# Altium PCB Fuel Level Monitoring System.PcbDoc
Units mil, origin at the board's own origin, x right, y up, seen from the top; angles counter-clockwise.
Board outline 4080 x 800 mil, 4 copper layers (Top Layer, Layer 1, Layer 2, Bottom Layer), stack 23.756 mil thick; 46 components, 41 nets, 127 pads, 37 vias.
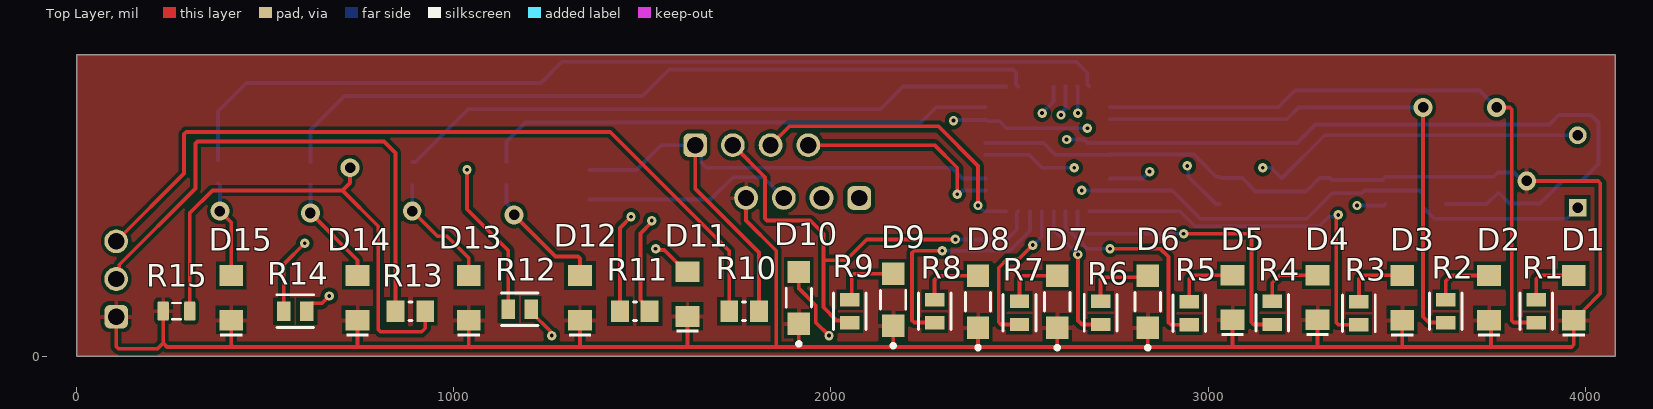
[diagram p0: Top Layer view]
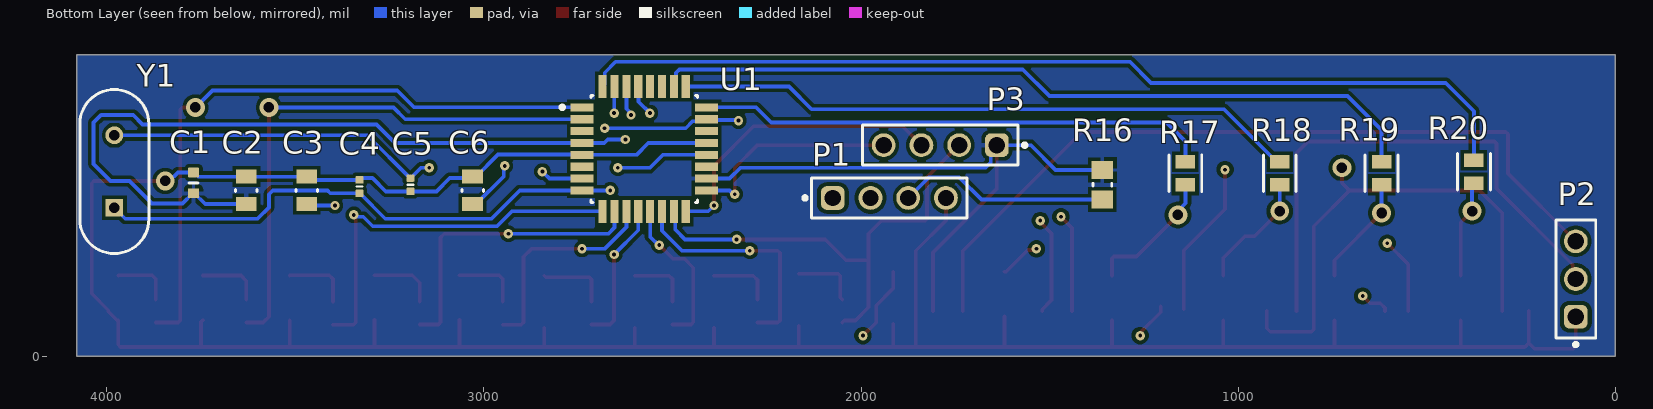
[diagram p1: Bottom Layer view, seen from below]
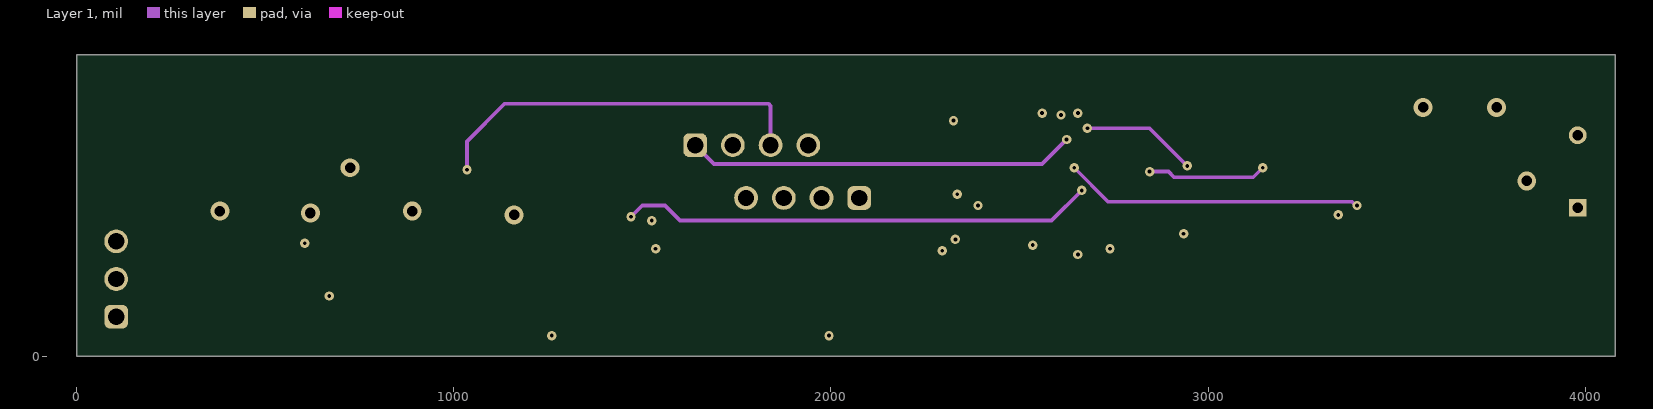
[diagram p2: Layer 1]
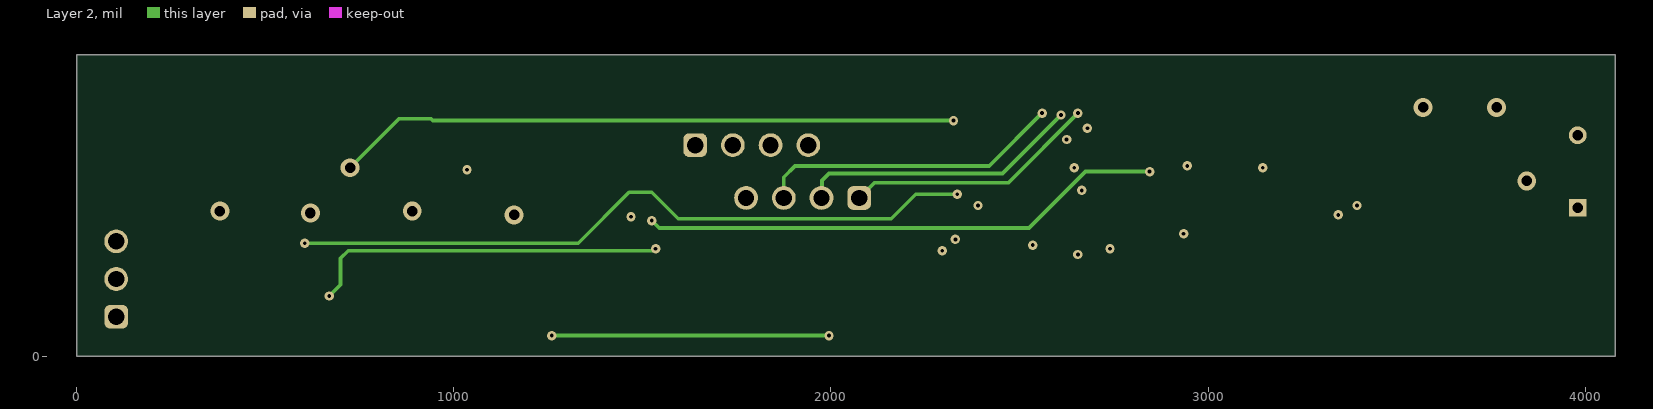
[diagram p3: Layer 2]
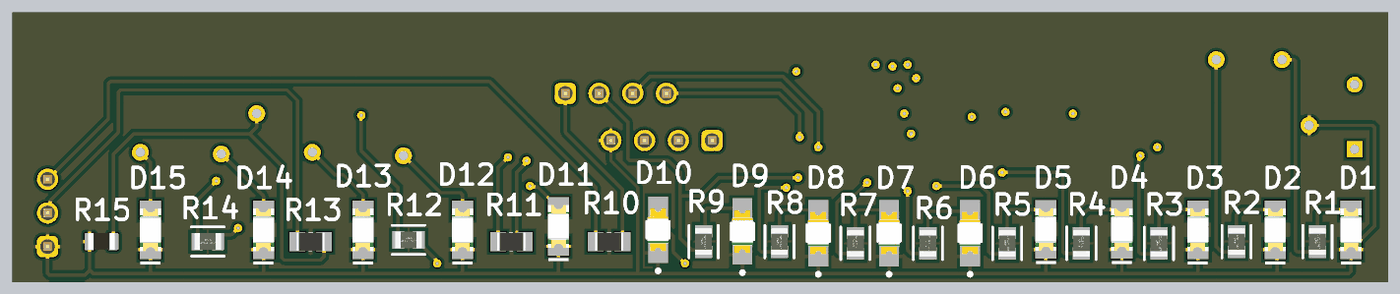
[diagram p4: 3D render of the assembled board from above, using the file's embedded part models]
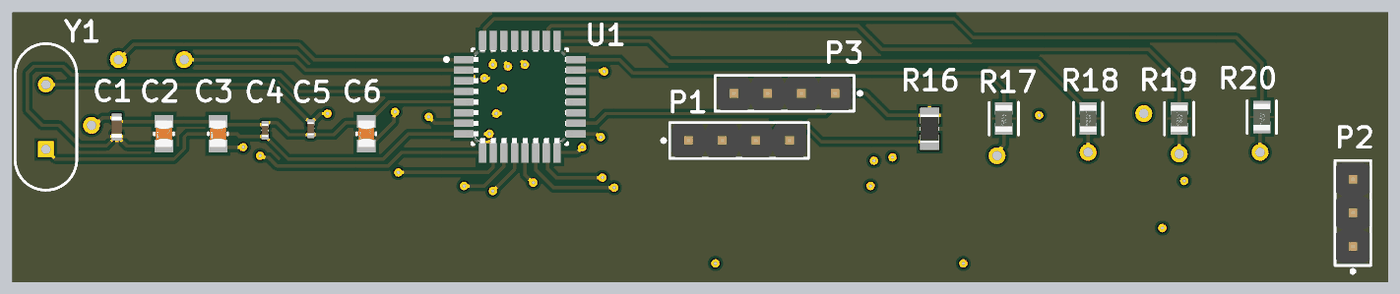
[diagram p5: 3D render of the assembled board from below, using the file's embedded part models]

## Layer stack, top to bottom
Top Solder: solder mask 0.4, Solder Resist, Dk 3.5
Top Layer: signal copper 1.4
Dielectric 2: prepreg 2.8, PP-006, Dk 4.1
Layer 1: signal copper 1.378
Dielectric 1: dielectric 12.6, FR-4, Dk 4.8
Layer 2: signal copper 1.378
Dielectric 3: prepreg 2.8, PP-006, Dk 4.1
Bottom Layer: signal copper 1.4
Bottom Solder: solder mask 0.4, Solder Resist, Dk 3.5

## Board outline
0,0 4080,0 4080,800 0,800

## Design rules (kind name [scope] priority, off if disabled: settings)
Clearance [All] p1: gap=10 ignorepadtopadclearanceinfootprint=TRUE except(0: Arc-Hole Track-Hole SMDPad-Hole THPad-Hole Via-Hole Fill-Hole Poly-Hole Region-Hole Text-Hole)
MinimumSolderMaskSliver [All] p1: minsoldermaskwidth=1
PolygonConnect [All] p1: connectstyle=Relief reliefconductorwidth=10 reliefentries=4 polygonreliefangle="90 Angle" airgapwidth=10
RoutingVias [All] p1: holewidth=28 width=50 viastyle="Through Hole" minholewidth=10 minwidth=20 maxholewidth=28 maxwidth=50
SilkToSolderMaskClearance [IsPad] p1: minsilkscreentomaskgap=1 clearancetoexposedcopper=TRUE
SolderMaskExpansion [All] p1: expansion=4 istentingtop=FALSE
Width [All] p1: maxlimit=10 minlimit=10 preferedwidth=10
28 further rules are at their usual default settings.

## Components (designator, comment, footprint, x,y, rotation, side; value= is the part's Value field where it differs from the comment)
C1 "Capacitor 10µF +/-20% 10V 0603" CAPC0603(1608)100_L 3770,460 r90 bottom value=10uF
C2 "0.1uF" FP-CC0805-0_85-MFG 3630,440 r270 bottom value="100 nF"
C3 "0.1uF" FP-CC0805-0_85-MFG 3470,440 r270 bottom value="100 nF"
C4 "Capacitor 22pF +/-10% 50V 0402" CAPC0402(1005)60_L 3330,450 r90 bottom value=22pF
C5 "Capacitor 22pF +/-10% 50V 0402" CAPC0402(1005)60_L 3195,455 r270 bottom value=22pF
C6 "0.1uF" FP-CC0805-0_85-MFG 3030,440 r270 bottom value="100 nF"
D1 "150120GS75000" WL-SMCW_1206_150120xx75000 3969.58,155 r90 top
D2 "150120GS75000" WL-SMCW_1206_150120xx75000 3745,155 r90 top
D3 "150120GS75000" WL-SMCW_1206_150120xx75000 3515,155 r90 top
D4 "150120GS75000" WL-SMCW_1206_150120xx75000 3290,155.94 r90 top
D5 "150120GS75000" WL-SMCW_1206_150120xx75000 3065,155.94 r90 top
D6 "LTST-C150KSKT" FP-LTST-C150KSKT-MFG 2840,145 r90 top
D7 "LTST-C150KSKT" FP-LTST-C150KSKT-MFG 2600,145 r90 top
D8 "LTST-C150KSKT" FP-LTST-C150KSKT-MFG 2390,145 r90 top
D9 "LTST-C150KSKT" FP-LTST-C150KSKT-MFG 2165,150 r90 top
D10 "LTST-C150KSKT" FP-LTST-C150KSKT-MFG 1915,155 r90 top
D11 "150120BS75000" WL-SMCW_1206_150120xx75000 1620,165 r90 top
D12 "150120BS75000" WL-SMCW_1206_150120xx75000 1335,155 r90 top
D13 "150120BS75000" WL-SMCW_1206_150120xx75000 1040,155 r90 top
D14 "150120RS75000" WL-SMCW_1206_150120xx75000 745,155 r90 top
D15 "150120RS75000" WL-SMCW_1206_150120xx75000 410,155 r90 top
P1 "61300411121" 61300411121 1925,420 r180 bottom
P2 "61300311121" 61300311121 105,205 r90 bottom
P3 "61300411121" 61300411121 1790,560 r0 bottom
R1 "CRGCQ0805J470R" FP-CRGCQ0805-IPC_C 3870,120 r90 top value=470Ω
R2 "CRGCQ0805J470R" FP-CRGCQ0805-IPC_C 3630,120 r90 top value=470Ω
R3 "CRGCQ0805J470R" FP-CRGCQ0805-IPC_C 3400,114.45 r90 top value=470Ω
R4 "CRGCQ0805J470R" FP-CRGCQ0805-IPC_C 3170,115 r90 top value=470Ω
R5 "CRGCQ0805J470R" FP-CRGCQ0805-IPC_C 2950,114.45 r90 top value=470Ω
R6 "CRGCQ0805J470R" FP-CRGCQ0805-IPC_C 2715,115 r90 top value=470Ω
R7 "CRGCQ0805J470R" FP-CRGCQ0805-IPC_C 2500,115 r90 top value=470Ω
R8 "CRGCQ0805J470R" FP-CRGCQ0805-IPC_C 2275,120 r90 top value=470Ω
R9 "CRGCQ0805J470R" FP-CRGCQ0805-IPC_C 2050,120 r90 top value=470Ω
R10 "RC0805JR-070RL" RESC2013X60X35ML10T20 1770,120 r0 top
R11 "RC0805JR-070RL" RESC2013X60X35ML10T20 1480,120 r180 top
R12 "CRGCQ0805J470R" FP-CRGCQ0805-IPC_C 1175,125 r0 top value=470Ω
R13 "RC0805JR-070RL" RESC2013X60X35ML10T20 885,120 r0 top
R14 "CRGCQ0805J470R" FP-CRGCQ0805-IPC_C 580,120 r0 top value=470Ω
R15 "Resistor 1K +/-5% 0805 125 mW" RESC0805(2012)_L 265,120 r0 top value=1k
R16 "RC0805JR-0710KL" RESC2013X60X35ML10T20 1360,455 r90 bottom
R17 "CRGCQ0805J470R" FP-CRGCQ0805-IPC_C 1140,485 r270 bottom value=470Ω
R18 "CRGCQ0805J470R" FP-CRGCQ0805-IPC_C 890,485 r270 bottom value=470Ω
R19 "CRGCQ0805J470R" FP-CRGCQ0805-IPC_C 620,485 r270 bottom value=470Ω
R20 "CRGCQ0805J470R" FP-CRGCQ0805-IPC_C 375,489.45 r270 bottom value=470Ω
U1 "ATMEGA328PB-AUR" FP-C04-074-MFG 2575,550 r180 bottom
Y1 "49S/18PF" JPY-49S-18PF 3980,490 r90 bottom

## Footprints (in the part's own frame and the unit in brackets; to place one, negate y for a bottom-side part, rotate by r counter-clockwise, add the part's x,y. Pads: shape width x height; smd on the part's side, far side on the other; paste and mask are expansions set on the pad)
61300311121 [mm] "Pin Header, pitch 2.54 mm, THT, Vertical, single row, 3p"
  rrect50% 1.6x1.6 hole 1.1: 1(-2.54,0)
  round 1.6 hole 1.1: 2(0,0) 3(2.54,0)
  silkscreen extent -4.53,-1.35 3.96,1.35, body extent -3.81,-1.27 3.81,1.27, height 8.57
61300411121 [mm] "Pin Header, pitch 2.54 mm, THT, Vertical, single row, 4p"
  rrect50% 1.6x1.6 hole 1.1: 1(-3.81,0)
  round 1.6 hole 1.1: 2(-1.27,0) 3(1.27,0) 4(3.81,0)
  silkscreen extent -5.8,-1.35 5.23,1.35, body extent -5.08,-1.27 5.08,1.27, height 8.57
CAPC0402(1005)60_L [mm] "Chip Capacitor, Body 1.0x0.5mm, Height 0.6mm, IPC High Density"
  rrect25% 0.5x0.55 smd: 1(-0.45,0) 2(0.45,0)
  silkscreen extent 0,-0.2 0,0.2, body extent -0.5,-0.25 0.5,0.25, height 0.6
CAPC0603(1608)100_L [mm] "Chip Capacitor, Body 1.6x0.8mm, Height 1.0mm, IPC High Density"
  rrect25% 0.66x0.76 smd: 1(-0.7,0) 2(0.7,0)
  silkscreen extent 0,-0.3 0,0.3, body extent -0.8,-0.4 0.8,0.4, height 0.95
FP-C04-074-MFG [mm]
  rect 1.55x0.55 smd paste+0 mask+0: 1(-4.2,2.8) 2(-4.2,2) 3(-4.2,1.2) 4(-4.2,0.4) 5(-4.2,-0.4) 6(-4.2,-1.2) 7(-4.2,-2) 8(-4.2,-2.8) 17(4.2,-2.8) 18(4.2,-2) 19(4.2,-1.2) 20(4.2,-0.4) 21(4.2,0.4) 22(4.2,1.2) 23(4.2,2) 24(4.2,2.8)
  rect 0.55x1.55 smd paste+0 mask+0: 9(-2.8,-4.2) 10(-2,-4.2) 11(-1.2,-4.2) 12(-0.4,-4.2) 13(0.4,-4.2) 14(1.2,-4.2) 15(2,-4.2) 16(2.8,-4.2) 25(2.8,4.2) 26(2,4.2) 27(1.2,4.2) 28(0.4,4.2) 29(-0.4,4.2) 30(-1.2,4.2) 31(-2,4.2) 32(-2.8,4.2)
  silkscreen extent -5.65,-3.6 3.6,3.6, body extent -4.51,-4.51 4.51,4.51, height 1.2
FP-CC0805-0_85-MFG [mm]
  rect 0.95x1.4 smd paste+0 mask+0: 1(-0.925,0) 2(0.925,0)
  silkscreen extent -0.08,-0.72 0.08,0.72, body extent -1,-0.63 1,0.63, height 0.95
FP-CRGCQ0805-IPC_C [mil]
  rect 35.67x51.57 smd paste+0 mask+0: 1(-30.55,0) 2(30.55,0)
  silkscreen extent -48,-43 48,43, body extent -52,-31 52,31, height 10
FP-LTST-C150KSKT-MFG [mm]
  rect 1.5x1.5 smd paste+0 mask+0: 1(-1.75,0) 2(1.75,0)
  silkscreen extent -3.22,-0.85 0.63,0.85, body extent -2.6,-0.95 2.6,0.95, height 0.25
JPY-49S-18PF [mm] "THD, 2-Leads, Body 11.05x4.65mm, Pitch 4.88mm"
  rect 1.2x1.2 hole 0.7: 1(-2.44,0)
  round 1.2 hole 0.7: 2(2.44,0)
  silkscreen extent -5.53,-2.32 5.53,2.32, body extent -5.52,-2.32 5.53,2.33, height 3.5
RESC0805(2012)_L [mm] "Chip Resistor, Body 2.0x1.3mm, IPC High Density"
  rrect25% 0.76x1.3 smd: 1(-0.9,0) 2(0.89,0)
  silkscreen extent -0.3,-0.55 0.3,0.55, body extent -1,-0.62 1,0.63, height 0.6
RESC2013X60X35ML10T20 [mm] "Chip Resistor, 2-Leads, Body 2.1x1.35mm, IPC Low Density"
  rect 1.2x1.45 smd: 1(-1,0) 2(1,0)
  silkscreen extent -0.1,-0.63 0.1,0.63, body extent -1.05,-0.68 1.05,0.67, height 0.6
WL-SMCW_1206_150120xx75000 [mm] "SMD Mono-color Chip LED, body 3.2x1.6mm"
  rect 1.4x1.6 smd: 1(-1.5,0) 2(1.5,0)
  silkscreen extent -2.6,-0.75 -2.4,0.75, body extent -1.6,-0.8 1.6,0.8, height 0.68

## Part data
C1: library part CMP-001-00075-4, "Chip Capacitor, 10µF +/-20%, 10V, 0603, Thickness 1 mm", Case/Package=0603, Max Operating Temperature=85°C, Min Operating Temperature=-55°C, Tolerance=10%, Voltage Rating=10V, Mounting Technology=SMT, Pins=2
C2 C3 C6: library part CMP-2100-03606-3, "CAP CER 0.1UF 50V X7R 0805", Capacitance="100 nF", Manufacturer=Yageo, Manufacturer Part Number=CC0805KRX7R9BB104, Package=CC0805-0.85, Temperature="-30°C to +85°C", Temperature Characteristic=X7R, Temperature Range High=+85°C, Temperature Range Low=-30°C, Tolerance=0.1, Voltage Rating="50 V", Automotive=No, Category=Cap, ComponentLink2Description=Datasheet, ComponentLink2URL=http://www.yageo.com/documents/recent/UPY-GPHC_Y5V_6.3V-to-50V_8.pdf, Device Class L1="Passive Components", Device Class L2=Capacitors, Device Class L3="Ceramic Capacitors", Digikey Description="CAP CER 0.1UF 50V X7R 0805", Footprint Url=http://www.yageo.com/exep/pages/download/literatures/UPY-C_GEN_24.pdf, Height=0.95mm, Ipc Land Pattern Name=CAPC200125X85, Lead Free=Yes, Material=Ceramic, Mouser Description="Multilayer Ceramic Capacitors MLCC - SMD/SMT 100nF 50V X7R 10%", Octopart=https://octopart.com/cc0805krx7r9bb104-yageo-192993, RoHS=TRUE
C4 C5: library part CMP-001-00073-3, "Chip Capacitor, 22pF +/-10%, 50V, 0402, Thickness 0.6 mm", Case/Package=0402, Max Operating Temperature=85°C, Min Operating Temperature=-55°C, Tolerance=10%, Voltage Rating=50V, Mounting Technology=SMT, Pins=2
D1 D2 D3 D4 D5: library part CMP-1426-00014-4, "WL-SMCW SMT Mono-Color Chip LED Waterclear", Case Code (Imperial)=1206, Case Code (Metric)=3216, Color=Green, Forward Current=100mA, Forward Voltage=3.2V, Max Junction Temperature (Tj)=95°C, Max Operating Temperature=85°C, Max Reverse Voltage (DC)=5V, Min Operating Temperature=-40°C, Power Dissipation=105mW, Test Current=20mA, Case/Package=1206, Dominant Wavelength=525nm, Height=680µm, Length=3.2mm, Lens Style="Clear, Rectangular", Luminous Intensity=450mcd, Mount="Surface Mount", Packaging="Tape and Reel", Peak Wavelength=515nm, REACH SVHC=Unknown, Reverse Voltage=5V, RoHS=Compliant, Viewing Angle=140°, Wavelength=525nm, Width=1.6mm
D6 D7 D8 D9 D10: library part CMP-2000-06618-2, "LED YELLOW CLEAR 1206 SMD", Case Code (Imperial)=1206, Case Code (Metric)=3216, Color=Yellow, Forward Current=30mA, Forward Voltage=2.4V, Lens Color=Colorless, Max Operating Temperature=85°C, Min Operating Temperature=-55°C, Package Quantity=1, Power Dissipation=75mW, Reverse Voltage=5V, Test Current=20mA, Case/Package=1206, Depth=1.6mm, Dominant Wavelength=587nm, Height=1.1mm, Illumination Color=Yellow, Lead Free="Lead Free", Length=3.2mm, Lens Style=Diffused, Lens Transparency=Clear, Luminous Intensity=60mcd, Mount="Surface Mount", Number of Elements=1, Number of LEDs=1, Number of Pins=2, Packaging="Tape and Reel", Power Rating=75mW, Radiation Hardening=No, Viewing Angle=130°, Wavelength=588nm, Width=1.6mm
D11 D12 D13: library part CMP-1426-00015-3, "WL-SMCW SMT Mono-Color Chip LED Waterclear", Case Code (Imperial)=1206, Case Code (Metric)=3216, Color=Blue, Forward Current=100mA, Forward Voltage=3.2V, Manufacturer Package Identifier=LED_1206, Max Operating Temperature=85°C, Max Reverse Voltage (DC)=5V, Min Operating Temperature=-40°C, Test Current=20mA, Case/Package=1206, Dominant Wavelength=470nm, Height=680µm, Length=3.2mm, Lens Style="Clear, Rectangular", Luminous Intensity=145mcd, Mount="Surface Mount", Packaging="Tape and Reel", Peak Wavelength=465nm, REACH SVHC=Unknown, RoHS=Compliant, Viewing Angle=140°, Wavelength=470nm, Width=1.6mm
D14 D15: library part CMP-1426-00013-4, "WL-SMCW SMT Mono-Color Chip LED Waterclear", Case Code (Imperial)=1206, Case Code (Metric)=3216, Color=Red, Forward Current=100mA, Forward Voltage=2V, Max Junction Temperature (Tj)=95°C, Max Operating Temperature=85°C, Max Reverse Voltage (DC)=5V, Min Operating Temperature=-40°C, Power Dissipation=72mW, Test Current=20mA, Case/Package=1206, Dominant Wavelength=625nm, Height=680µm, Length=3.2mm, Lens Style="Clear, Rectangular", Luminous Intensity=150mcd, Mount="Surface Mount", Packaging="Tape and Reel", Peak Wavelength=630nm, REACH SVHC=Unknown, Reverse Voltage=5V, RoHS=Compliant, Viewing Angle=140°, Wavelength=625nm, Width=1.6mm
P1 P3: library part CMP-1502-01064-3, Color=Black, Contact Resistance=20mΩ, Current rating=3A, Max Operating Temperature=105°C, Min Operating Temperature=-40°C, Operating Supply Voltage=250V, Connector Type="Male Pin", Contact material=Copper, Contact Mating Length=5.9944mm, Contact Plating=Gold, Gender=Male, Height=8.89mm, Lead Free="Lead Free", Lead Pitch=2.54mm, Mount="Through Hole", NexarPartId=32855522, Number Of Contacts=4, Number of Pins=4, Number of Positions=4, Number of Rows=1, Orientation=Vertical, Packaging=Bulk, Pitch=2.54mm, REACH SVHC=Unknown, RoHS=Compliant, Termination=Solder, Voltage Rating=250V
P2: library part CMP-1502-01062-3, Color=Black, Contact Resistance=20mΩ, Current rating=3A, Max Operating Temperature=105°C, Min Operating Temperature=-40°C, Operating Supply Voltage=250V, Connector Type="Male Pin", Contact material=Copper, Contact Mating Length=5.9944mm, Contact Plating=Gold, Gender=Male, Height=8.94mm, Lead Free="Lead Free", Lead Pitch=2.54mm, Mount="Through Hole", NexarPartId=32855521, Number Of Contacts=3, Number of Pins=3, Number of Positions=3, Number of Rows=1, Orientation=Vertical, Packaging=Bulk, Pitch=2.54mm, REACH SVHC=Unknown, RoHS=Compliant, Termination=Solder, Voltage Rating=250V
R1 R2 R3 R4 R5 R6 R7 R8 R9 R12 R14 R17 R18 R19 R20: library part CMP-03211-002267-1, "CRGCQ0805 470Ω 0.125W ±100ppm/°C 5% 150V", Ambient Temperature Range High=+70°C, Manufacturer="TE Connectivity", Package=CRGCQ0805, Power Rating=0.125W, Resistance=470Ω, Temperature="-55°C to +155°C", Temperature Coefficient=±100ppm/°C, Temperature Range High=+155°C, Temperature Range Low=-55°C, Tolerance=0.05, Voltage Rating=150V, Automotive=Yes, Automotive Grade="Grade 610", Category=Res, ComponentLink2Description=Datasheet, ComponentLink2URL=https://www.te.com/commerce/DocumentDelivery/DDEController?Action=showdoc&DocId=Data+Sheet%7F1773204-3%7F1%7Fpdf%7FEnglish%7FENG_DS_1773204-3_1.pdf%7F4-2176341-619, Composition="Thick Film", Device Class L1="Passive Components", Device Class L2=Resistors, Device Class L3="Chip SMD Resistors", Height=0.65mm, Ipc Land Pattern Name=RESC200125X55, Lead Free=Yes, Manufacturer Part Number=CRGCQ0805J470R, Octopart=https://octopart.com/crgcq0805j470r-te+connectivity-91018229, RoHS=TRUE, Series=CRGCQ
R10 R13: library part CMP-2100-03673-1, "Chip Resistor, 0 Ohm, Jumper, +/- 5%, 0.125 W, -55 to 155 degC, 0805 (2012 Metric), RoHS, Tape and Reel", Case Code (Imperial)=0805, Case Code (Metric)=2012, Manufacturer=Yageo, Max Operating Temperature=155degC, Min Operating Temperature=-55degC, Package Description="2-Pin Surface Mounted Device, Body 2 x 1.25 mm", Power Rating=125mW, Resistance="0 Ohm", Temperature Coefficient=200ppm/degreesC, Tolerance=5%, Voltage Rating=150V, Case/Package=0805, Composition=ThickFilm, Contact Plating=Tin, Datasheet URL=http://www.yageo.com/NewPortal/yageodocoutput?fileName=/pdf/R-Chip/PYu-RC_Group_51_RoHS_L_5.pdf, Datasheet Version="Rev. 5, 10/2016", Depth=1.25mm, Height=0.5mm, Lead Free=LeadFree, Length=2mm, Manufacturer URL=http://www.yageo.com/, Military Standard=Not, Number of Pins=2, Package Reference=0805, Packaging=TapeandReel, Radiation Hardening=No, REACH SVHC=Unknown, RoHSCompliant=true, Termination=SMD/SMT, Voltage Rating (DC)=150V, Width=1.25mm
R11: library part CMP-2100-03673-1, "Chip Resistor, 0 Ohm, Jumper, +/- 5%, 0.125 W, -55 to 155 degC, 0805 (2012 Metric), RoHS, Tape and Reel", Case Code (Imperial)=0805, Case Code (Metric)=2012, Manufacturer=Yageo, Max Operating Temperature=155degC, Min Operating Temperature=-55degC, Package Description="2-Pin Surface Mounted Device, Body 2 x 1.25 mm", Power Rating=125mW, Resistance=DNP, Temperature Coefficient=200ppm/degreesC, Tolerance=5%, Voltage Rating=150V, Case/Package=0805, Composition=ThickFilm, Contact Plating=Tin, Datasheet URL=http://www.yageo.com/NewPortal/yageodocoutput?fileName=/pdf/R-Chip/PYu-RC_Group_51_RoHS_L_5.pdf, Datasheet Version="Rev. 5, 10/2016", Depth=1.25mm, Height=0.5mm, Lead Free=LeadFree, Length=2mm, Manufacturer URL=http://www.yageo.com/, Military Standard=Not, Number of Pins=2, Package Reference=0805, Packaging=TapeandReel, Radiation Hardening=No, REACH SVHC=Unknown, RoHSCompliant=true, Termination=SMD/SMT, Voltage Rating (DC)=150V, Width=1.25mm
R15: library part CMP-009-00118-3, "Chip Resistor, 1 kOhms, +/-5%, 125 mW, -55 to 155 degC, 0805", Case/Package=0805, Max Operating Temperature=155°C, Min Operating Temperature=-55°C, Power=125mW, Tolerance=5%, Pins=2
R16: library part CMP-2000-05025-1, "Chip Resistor, 10 KOhm, +/- 5%, 0.125 W, -55 to 155 degC, 0805 (2012 Metric), RoHS, Tape and Reel", Manufacturer=Yageo, Package Description="2-Pin Surface Mounted Device, Body 2 x 1.25 mm", Package Reference=805, Power Rating=250mW, Resistance=10kohm, Resistance Tolerance=±5%, Resistor Case Style=0805[2012Metric], Resistor Element Type=ThickFilm, Temperature Coefficient=±100ppm/degC, Voltage Rating=150V, Automotive Qualification Standard=-, Datasheet URL=http://www.yageo.ru/pdf/RC0805.pdf, Datasheet Version="REV. 2, 09/2004", Manufacturer URL=http://www.yageo.com/, MSL=MSL1-Unlimited, Packaging=CutTape, Product Range=RCSeries, SVHC=ToBeAdvised
U1: library part CMP-06276-000006-1, "IC MCU 8BIT 32KB FLASH 32TQFP", Frequency=20MHz, Manufacturer=Microchip, Max Supply Voltage=5.5V, Min Supply Voltage=1.8V, Nominal Supply Current=0.06-5.2mA, Package=C04-074, Temperature="-40°C to +85°C", Temperature Range High=+85°C, Temperature Range Low=-40°C, Automotive=No, Category=IC, ComponentLink2Description=Datasheet, ComponentLink2URL=http://ww1.microchip.com/downloads/en/DeviceDoc/40001906C.pdf, Core Architecture=AVR, Data Bus Width=8bits, Device Class L1="Integrated Circuits (ICs)", Device Class L2="Embedded Processors and Controllers", Device Class L3=Microcontrollers, Digikey Description="IC MCU 8BIT 32KB FLASH 32TQFP", Footprint Url=https://ww1.microchip.com/downloads/en/DeviceDoc/32L_TQFP_7x7x1_0mm_PT_C04-00074c.pdf, Height=1.2mm, Interface=I2C,SPI,UART,USART,2-Wire, Ipc Land Pattern Name=QFP80P900X900X120-32, Lead Free=Yes, Manufacturer Part Number=ATMEGA328PB-AUR, Memory Size=32KBytes, Memory Type=FLASH, Number Of A/D Converters=1, Number Of Adc Channels=8, Number Of Cores=1, Number Of I2C Channels=2, Number Of I/Os=27, Number Of Pwm Channels=10, Number Of Spi Channels=2, Number Of Timers/Counters=5, Number Of Uart Channels=2, Octopart=https://octopart.com/atmega328pb-aur-microchip-77760229, Ram Size=2KBytes, RoHS=TRUE, Standoff Height=0.05mm
Y1: library part CMP-003-00000-2, "Crystal, 16 MHz, +/-20 ppm, 18 pF, -20 to 70 degC, 2-Pin THD, RoHS", Case/Package=49S-18PF, Frequency=16MHz, Manufacturer="Shenzhen Jingpengyuan", Package Description="2-Pin Through Hole Device, Body 11.05 x 4.65 mm, Pitch 4.88 mm", Datasheet URL=http://datasheet.octopart.com/49S-18PF-Xinhunjing-datasheet-30677139.pdf, Datasheet Version=Aug-14, Manufacturer URL=http://www.chjiahui.com/, Mounting Technology=TH, Package Reference=49S-18PF, RoHS Compliant=Unknown

## Via types
v1: diameter 25, hole 10, Top Layer to Bottom Layer, 29 vias
v2: diameter 50, hole 28, Top Layer to Bottom Layer, 8 vias

## Nets (pads, with @x,y where several pads share a name; then routed paths per layer and width w, separated by ;. In a path a pad name is that pad's centre, name@x,y a point inside that pad or via, vN(x,y) a via of type N, cw(c..) or ccw(c..) an arc to the next point about the centre after c; other vN are vias at no path point)
GND: C1.2 C2.1 C3.1 C4.2 C5.2 C6.1 D1.1 D2.1 D3.1 D4.1 D5.1 D6.1 D7.1 D8.1 D9.1 D10.1 D11.1 D12.1 D13.1 D14.1 D15.1 P1.4 P2.1 R15.1 U1.5 U1.21 | length 7579.5
  Top Layer w10: P2.1 105,25.86 110.86,20 214.13,20 229.57,35.43 ; R15.1 229.57,35.43 ; D15.1 410,30 415,25 ; D14.1 745,25 ; D13.1 1040,25 ; D12.1 1335,30 1330,25 ; D11.1 1620,25 ; P1.4 1775,360 1855,280 1855,25 ; D10.1 1915,25 ; D9.1 2165,25 ; D8.1 2390,25 ; D7.1 2600,25 ; D6.1 2840,25 ; D5.1 3065,25 ; D4.1 3290,25 ; D3.1 3515,25 ; D2.1 3750,90.94 3750,25 ; v2(3845,465) 4034.14,465 4040,459.14 4040,166.37 3996.07,122.44 3996.07,118.5 3973.51,95.94 D1.1 3969.58,30.86 3963.72,25 3750,25 ; 229.57,35.43 240,25 410,25 415,25 ; 415,25 745,25 ; 745,25 1040,25 ; 1040,25 1330,25 ; 1330,25 1335,25 1620,25 ; 1620,25 1855,25 ; 1855,25 1915,25 ; 1915,25 2165,25 ; 2165,25 2390,25 ; 2390,25 2600,25 ; 2600,25 2840,25 ; 2840,25 3065,25 ; 3065,25 3290,25 ; 3290,25 3515,25 ; 3515,25 3750,25
  Bottom Layer w10: U1.21 2564.25,565.75 2595.75,534.25 U1.5 ; U1.5@2740.35,535 2962.56,535 3021.14,476.42 C6.1 3033.7,472.72 3090.62,472.72 3126.05,437.28 C5.2 3260.42,437.28 3295.85,472.72 3324.02,472.72 3329.02,467.72 C4.2 3461.3,467.72 C3.1 C2.1 3756.9,476.42 3768.04,487.56 C1.2 3811.62,487.56 3834.18,465 v2(3845,465)
NetC3_2: C3.2 U1.20 | length 1117.4
  Layer 1 w10: v1(2645,500) 2735,410 3381.64,410 3391.64,400 v1(3395,400)
  Bottom Layer w10: U1.20 2525.75,534.25 2560,500 v1(2645,500) ; v1(3395,400) 3466.42,400 C3.2
NetD1_2: D1.2 R1.2 | length 158.6
  Top Layer w10: R1.2 3870,205 3880,215 3968.63,215 D1.2
NetD2_2: D2.2 R2.2 | length 170.3
  Top Layer w10: R2.2 3630,200 3644.06,214.06 D2.2
NetD3_2: D3.2 R3.2 | length 179.5
  Top Layer w10: R3.2 3400,205 3410,215 3514.06,215 D3.2
NetD4_2: D4.2 R4.2 | length 177.7
  Top Layer w10: R4.2 3170,195 3190,215 D4.2
NetD5_2: D5.2 R5.2 | length 179.1
  Top Layer w10: R5.2 2950,205 2960,215 D5.2
NetD6_2: D6.2 R6.2 | length 187.6
  Top Layer w10: R6.2 2715,204.14 2720.86,210 2836.1,210 D6.2
NetD7_2: D7.2 R7.2 | length 163.1
  Top Layer w10: R7.2 2500,205 2508.9,213.9 D7.2
NetD8_2: D8.2 R8.2 | length 171.8
  Top Layer w10: R8.2 2275,202.8 2286.1,213.9 D8.2
NetD9_2: D9.2 R9.2 | length 177
  Top Layer w10: R9.2 2055,155.55 2055,213.04 2060.86,218.9 D9.2
NetD10_2: D10.2 R12.2 | length 1037.5
  Top Layer w10: R12.2@1205.55,132.95 R12.2 1205.55,117.05 1257.13,65.48 1257.13,57.87 v1(1260,55) ; D10.2 1915,180 1960,135 1960,90 v1(1995,55)
  Layer 2 w10: v1(1260,55) v1(1995,55)
NetD11_2: D11.2 R14.2 | length 1146.6
  Top Layer w10: R14.2 610.55,127.95 623.39,140.78 650.78,140.78 v1(670,160) ; v1(1535,285) 1537.87,282.13 1557.99,282.13 1616.06,224.06 D11.2
  Layer 2 w10: v1(670,160) 700,190 700,260 720,280 v1@1535,280
NetD12_2: D12.2 R17.2 | length 355.8
  Top Layer w10: v2(1160,375) 1270,265 1329.14,265 1335,259.14 D12.2
  Bottom Layer w10: R17.2 1140,405.82 1160,385.82 v2(1160,375)
NetD13_2: D13.2 R18.2 | length 317.2
  Top Layer w10: v2(890,385) 956.33,318.67 981.33,318.67 1040,260 D13.2
  Bottom Layer w10: v2(890,385) R18.2
NetD14_2: D14.2 R19.2 | length 292.2
  Top Layer w10: v2(620,380) 745,255 D14.2
  Bottom Layer w10: v2(620,380) R19.2
NetD15_2: D15.2 R20.2 | length 259.3
  Top Layer w10: v2(380,385) 410,355 D15.2
  Bottom Layer w10: R20.2 380,453.89 v2(380,385)
NetP2_2: P2.2 R13.1 | length 1411.2
  Top Layer w10: P2.2 112.88,212.88 112.88,242.88 315,445 315,564.14 320.86,570 815,570 845.63,539.37 R13.1
NetP2_3: P2.3 R10.1 | length 2096.9
  Top Layer w10: P2.3 285,485 285,589.14 290.86,595 1415,595 1730.63,279.37 R10.1
NetR1_1: R1.1 U1.1 | length 1735.5
  Top Layer w10: v2@3760,660 v2(3765,660) 3799.14,660 3805,654.14 3805,95.3 3810.86,89.45 R1.1
  Bottom Layer w10: U1.1 3185.24,660.24 3230,705 3720,705 v2(3765,660)
NetR2_1: R2.1 U1.2 | length 1456
  Top Layer w10: v2@3570,651.92 3570,105 3585.55,89.45 R2.1
  Bottom Layer w10: U1.2 3208.74,628.74 3240,660 v2(3570,660)
NetR3_1: R3.1 U1.9 | length 1019.1
  Top Layer w10: v1@3340,365 3340,90 3346.11,83.89 R3.1
  Bottom Layer w10: U1.9 2925.35,384.65 2965,345 3295,345 3320,370 v1@3340,370
  other v1: 3345,375
NetR4_1: R4.1 U1.10 | length 797.6
  Top Layer w10: v1(2935,325) 3105,325 3115,315 3115,90.3 3120.86,84.45 R4.1
  Bottom Layer w10: U1.10 2653.74,341.26 2670,325 v1(2935,325)
NetR5_1: R5.1 U1.11 | length 578.9
  Top Layer w10: v1(2740,285) 2874.14,285 2895,264.14 2895,90 2901.11,83.89 R5.1
  Bottom Layer w10: U1.11 2622.24,342.76 2680,285 v1(2740,285)
PB6: C5.1 R11.1 U1.7 Y1.2 | length 2968.1
  Top Layer w10: R11.1 1519.37,124.92 1495,149.29 1495,325.94 1525,355.94 v1(1525,360)
  Layer 1 w10: v1(2845,490) 2895,490 2910,475 3120,475 v1(3145,500)
  Layer 2 w10: v1(1525,360) 1545,340 2525,340 2675,490 v1(2845,490)
  Bottom Layer w10: U1.7 2826.26,471.26 v1@2840,485 ; v1(3145,500) 3166.73,500 3194.02,472.72 C5.1 3195.98,472.72 3309.33,586.06 Y1.2
PB7: C4.1 R11.2 U1.8 Y1.1 | length 2959
  Top Layer w10: R11.2 1440.63,340.63 v1(1470,370)
  Layer 1 w10: v1(1470,370) 1500,400 1560,400 1600,360 2585,360 v1(2665,440)
  Bottom Layer w10: v1(2665,440) 2665.12,439.88 2740.24,439.88 U1.8 2905.24,439.76 2980,365 3261.73,365 C4.1@3329.02,432.28 ; C4.1 3407.28,432.28 3415,440 3560,440 3570,430 3570,395 3600,365 3951.06,365 Y1.1
PC0: C6.2 R13.2 R15.2 U1.23 | length 3813.5
  Top Layer w10: R15.2 300.04,380.04 360,440 705,440 ; v2(725,500) 725,460 705,440 ; R13.2 924.37,74.37 915,65 805.86,65 800,70.86 800,345 705,440
  Layer 1 w10: v1(2680,605) 2845,605 v1(2945,505)
  Layer 2 w10: v2(725,500) 855,630 940,630 945,625 v1(2325,625)
  Bottom Layer w10: v1(2325,625) 2326.87,626.87 2407.78,626.87 U1.23 2415.11,623.27 2446.73,623.27 2465,605 v1(2680,605) ; v1(2945,505) 2947.22,502.78 2947.22,477.5 3021.14,403.58 C6.2
PD0: P1.2 U1.30 | length 832.9
  Layer 2 w10: P1.2 1976.5,421.5 1976.5,466.5 1995,485 2455,485 v1(2610,640)
  Bottom Layer w10: v1(2610,640) 2610,644.06 2622.24,656.3 U1.30
PD1: P1.1 U1.31 | length 744.1
  Layer 2 w10: P1.1 2115,460 2470,460 v1(2655,645)
  Bottom Layer w10: U1.31 2654.37,714.72 2654.37,645.63 v1(2655,645)
R6: R6.1 U1.12 | length 380.6
  Top Layer w10: v1(2655,270) 2655,95 2665.55,84.45 R6.1
  Bottom Layer w10: U1.12 2590.75,334.25 v1(2655,270)
R7: R7.1 U1.13 | length 418.2
  Top Layer w10: R7.1 2450.86,84.45 2445,90.3 2445,235 2468.56,258.57 2498.56,258.57 v1(2535,295)
  Bottom Layer w10: v1(2535,295) 2537.54,295 2559.25,316.71 U1.13
R8: R8.1 U1.14 | length 630.2
  Top Layer w10: R8.1 2220.86,89.45 2215,95.3 2215,274.14 2220.86,280 v1(2295,280)
  Bottom Layer w10: v1(2295,280) 2475,280 2527.76,332.76 U1.14
R9: P3.2 R9.1 U1.15 | length 1293.7
  Top Layer w10: P3.2 1825,475 1825,365.86 1830.86,360 1945,360 1980,325 1980,255 ; R9.1 2044.52,94.93 2015.07,94.93 1980,130 1980,255 ; v1(2330,310) 2095,310 2040,255 1980,255
  Bottom Layer w10: P3.2@1740,545.66 P3.2 ; v1(2330,310) 2466.64,310 2492.5,335.86 2492.5,380.88 U1.15
R12: P3.3 R12.1 U1.16 | length 2243.7
  Top Layer w10: v1(1035,495) 1035,390 1144.45,280.55 R12.1 ; P3.3 1890,610 2285,610 2390,505 v1(2390,400)
  Layer 1 w10: v1(1035,495) 1035,570 1135,670 1834.14,670 1840,664.14 P3.3
  Bottom Layer w10: v1(2390,400) 2405.35,384.65 U1.16
R14: P3.4 R14.1 U1.17 | length 2613.4
  Top Layer w10: R14.1 549.45,244.45 v1(605,300) ; P3.4 2275,560 2335,500 v1(2335,430)
  Layer 2 w10: v1(605,300) 1330,300 1465,435 1525,435 1595,365 2160,365 2225,430 v1(2335,430)
  Bottom Layer w10: v1(2335,430) 2339.06,430 2348.82,439.76 U1.17
R17: R17.1 U1.24 | length 1361.5
  Bottom Layer w10: R17.1 1140,570 1190,620 2238.34,620 2278.58,660.24 U1.24
R18: R18.1 U1.25 | length 1657.5
  Bottom Layer w10: R18.1 897.95,515.55 1037.39,655 2131.12,655 2191.47,715.35 U1.25
R19: R19.1 U1.26 | length 2064.4
  Bottom Layer w10: R19.1 620,600 710,690 1500.61,690 1571.48,760.87 2481.8,760.87 2490.59,752.08 2490.59,721.02 U1.26
R20: R20.1 U1.32 | length 2539.8
  Bottom Layer w10: R20.1 375,650 450,725 1231.13,725 1287,780.87 2650.78,780.87 2679.57,752.08 2679.57,721.02 U1.32
RESET: P1.3 R16.1 U1.29 | length 1455.9
  Layer 2 w10: P1.3 1875,475 1905,505 2420,505 v1(2560,645)
  Bottom Layer w10: R16.1 1680.63,415.63 1740,475 1820,475 P1.3 ; v1(2560,645) 2590,675 2590,714.61 U1.29
VCC: C1.1 C2.2 P3.1 R10.2 R16.2 U1.4 U1.18 | length 4708.6
  Top Layer w10: P3.1 1640,445 1809.37,275.63 R10.2
  Layer 1 w10: P3.1 1690,510 2560,510 v1(2625,575)
  Bottom Layer w10: R16.2 1484.37,494.37 1550,560 P3.1 1656.5,543.5 1656.5,513.5 1670,500 2320,500 2348.74,471.26 U1.18 ; v1(2625,575) 2671.67,575 2680.93,565.75 U1.4 3235.75,565.75 3285,615 3905,615 3930,640 4015,640 4035,620 4035,510 3990,465 3940,465 3880,405 3799.4,405 3771.96,432.44 C1.1 3768.04,432.44 3739.18,403.58 C2.2
pads on no net: U1.3 U1.6 U1.19 U1.22 U1.27 U1.28

## Polygon pours and split planes (outlines as drawn)
GND on Top Layer "GND_L01_P000" (solid, pour order 0): 0,800 4080,800 4080,0 0,0
VCC on Bottom Layer "VCC_L04_P001" (solid, pour order 1): 0,0 0,800 4080,800 4080,0